# Altium PCB treehopper-fob.PcbDoc
Units mm, origin at the board's own origin, x right, y up, seen from the top; angles counter-clockwise.
Board outline 14.73 x 23.37 mm, 2 copper layers (Top Layer, Bottom Layer), stack 0.871 mm thick; 13 components, 20 nets, 80 pads, 40 vias.
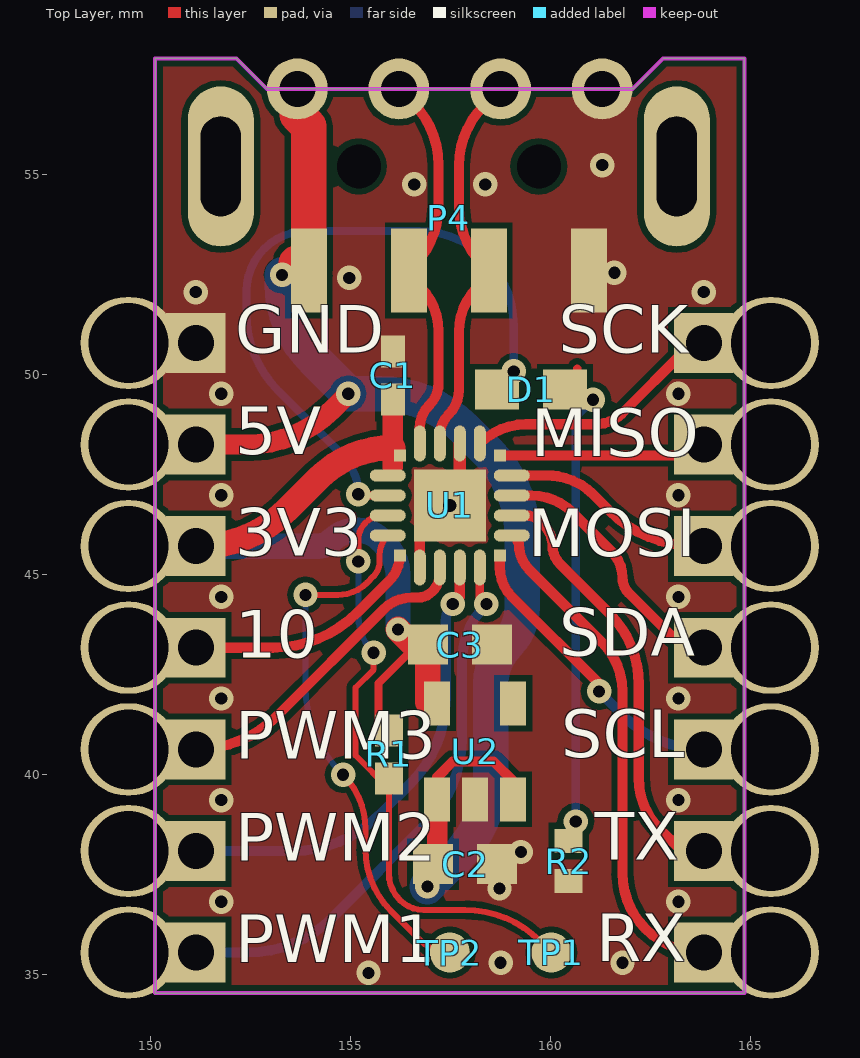
[diagram p0: Top Layer view]
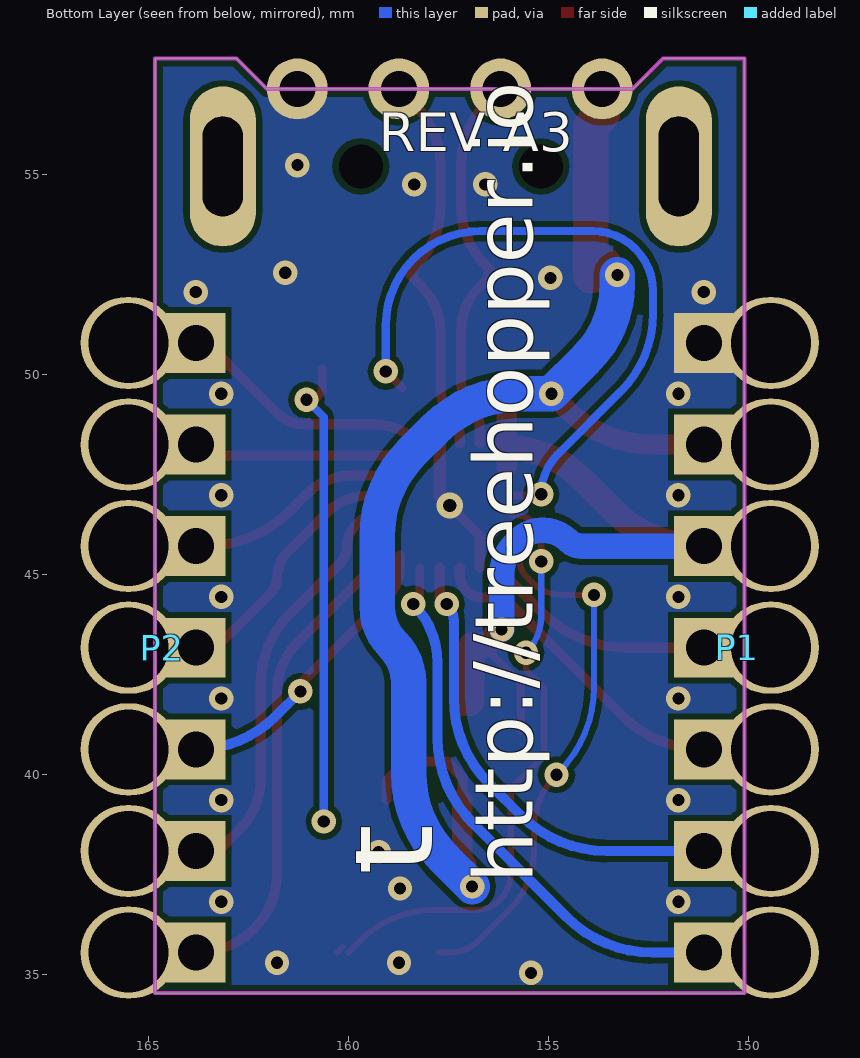
[diagram p1: Bottom Layer view, seen from below]

## Layer stack, top to bottom
Top Solder: solder mask 0.0102, Solder Resist, Dk 3.5
Top Layer: signal copper 0.0356
Dielectric 1: dielectric 0.8, FR-4, Dk 4.8
Bottom Layer: signal copper 0.0356
Bottom Solder: solder mask 0.0102, Solder Resist, Dk 3.5

## Board outline
150.114,34.544 150.114,57.912 152.146,57.912 152.908,57.15 162.052,57.15 162.814,57.912 164.846,57.912 164.846,34.544

## Design rules (kind name [scope] priority, off if disabled: settings)
Clearance [All] p1: gap=0.152
ComponentClearance [All] p1: gap=0 collisioncheckmode=3 verticalgap=0 showdistances=FALSE
DiffPairsRouting [All] p1: maxlimit=0.254 minlimit=0.152 mostfreqgap=0.254 toplayer_minwidth=0.152 toplayer_maxwidth=0.381 toplayer_prefwidth=0.203 bottomlayer_minwidth=0.152 bottomlayer_maxwidth=0.381 bottomlayer_prefwidth=0.203 maxuncoupledlength=12.7
HoleSize [All] p1: absolutevalues=TRUE maxlimit=12.7 minlimit=0.305 maxpercent=80.000 minpercent=20.000
HoleToHoleClearance [All] p1: gap=0 allowstackedmicrovias=TRUE
MinimumSolderMaskSliver [All] p1: minsoldermaskwidth=0
PlaneConnect [All] p1: planeconnectstyle=Direct reliefexpansion=0.508 reliefentries=4 reliefconductorwidth=0.254 reliefairgap=0.254
PolygonConnect [All] p1: connectstyle=Direct reliefconductorwidth=0.254 reliefentries=4 polygonreliefangle="90 Angle" airgapwidth=0.254
RoutingVias [All] p1: holewidth=0.305 width=0.61 viastyle="Through Hole" minholewidth=0.305 minwidth=0.61 maxholewidth=0.711 maxwidth=1.27
SilkToSilkClearance [All] p1: silktosilkclearance=0
SilkToSolderMaskClearance [IsPad] p1: minsilkscreentomaskgap=0 clearancetoexposedcopper=TRUE
SolderMaskExpansion [All] p1: expansion=0
Width [All] p1: maxlimit=12.7 minlimit=0.152 preferedwidth=0.203
22 further rules are at their usual default settings.

## Classes and differential pairs
differential pair USB_D: +USB_D_P -USB_D_N

## Components (designator, comment, footprint, x,y, rotation, side; value= is the part's Value field where it differs from the comment)
C1 "100n" CAPC1005N 156.058,49.987 r270 top
C2 "4u7" CAPC1608N 157.861,37.77 r180 top
C3 "10u" CAPC1608N 157.734,43.256 r180 top
D1 "GREEN" LTST-C190GKT_NO_SILK 159.512,49.632 r0 top
P1 "Header 7" HDR1X7_CASTELATED 151.13,35.56 r90 bottom
P2 "Header 7" HDR1X7_CASTELATED 163.83,50.8 r270 bottom
P4 "USB A Plug" USB/SM2.5-4H4_NOSILK 157.455,57.912 r90 top
R1 "1k" RESC1005N#1 155.956,40.513 r90 top
R2 "1k" RESC1005N#2 160.452,37.846 r90 top
TP1 "TESTPOINT" TESTPOINT100 160.02,35.56 r0 top
TP2 "TESTPOINT" TESTPOINT100 157.48,35.56 r0 top
U1 "EFM8UB10F16G-B-QFN20" QFN50P300X300X90-20N-NO-SILK 157.48,46.736 r270 top
U2 "AP2112K-3.3" SOT23-5AN-no-silk 158.115,40.589 r90 top

## Footprints (in the part's own frame and the unit in brackets; to place one, negate y for a bottom-side part, rotate by r counter-clockwise, add the part's x,y. Pads: shape width x height; smd on the part's side, far side on the other; paste and mask are expansions set on the pad)
CAPC1005N [mm] "Chip Capacitor (0402), Body 1.0x0.5mm, IPC Medium Density"
  rect 0.8x0.6 smd: 1(-0.6,0) 2(0.6,0)
  body extent -0.5,-0.3 0.5,0.3, height 0.2
CAPC1608N [mm] "Chip Capacitor (0603), Body 1.6x0.8mm, IPC Medium Density"
  rect 1x1 smd: 1(-0.8,0) 2(0.8,0)
  body extent -1,-0.39 1,0.39, height 0.79
HDR1X7_CASTELATED [mil] "Connector; Header; 7 Position"
  oval 90.55x95 hole 78.74: 1(0,-66) 2(100,-66) 3(200,-66) 4(300,-66) 5(400,-66) 6(500,-66) 7(600,-66)
  rect 59x59 hole 35.43: 1(0,0) 2(100,0) 3(200,0) 4(300,0) 5(400,0) 6(500,0) 7(600,0)
LTST-C190GKT_NO_SILK [mm] "Blue LED, 0603"
  rect 1.1x1 smd: 1(-0.85,0) 2(0.85,0)
  body extent -0.85,-0.45 0.85,0.45, height 0.9
QFN50P300X300X90-20N-NO-SILK [mm] "QFN, 16+4 Leads, Body 3.00x3.00mm, Pitch 0.50mm, IPC Medium Density"
  rect 0.3x0.3 smd: 1(-1.25,1.25) 6(-1.25,-1.25) 11(1.25,-1.25) 16(1.25,1.25)
  oval 0.9x0.3 smd: 2(-1.55,0.75) 3(-1.55,0.25) 4(-1.55,-0.25) 5(-1.55,-0.75) 12(1.55,-0.75) 13(1.55,-0.25) 14(1.55,0.25) 15(1.55,0.75)
  oval 0.3x0.9 smd: 7(-0.75,-1.55) 8(-0.25,-1.55) 9(0.25,-1.55) 10(0.75,-1.55) 17(0.75,1.55) 18(0.25,1.55) 19(-0.25,1.55) 20(-0.75,1.55)
  rect 1.8x1.8 smd mask+0: 21(0,0)
  body extent -1.5,-1.5 1.5,1.5, height 0.92
RESC1005N#1 [mm] "Chip Resistor, Body 1.1x0.5mm, IPC Medium Density"
  rect 0.8x0.7 smd: 1(-0.6,0) 2(0.6,0)
  body extent -0.5,-0.25 0.5,0.25, height 0.38
RESC1005N#2 [mm] "Chip Resistor, Body 1.1x0.5mm, IPC Medium Density"
  rect 0.6x0.7 smd: 1(-0.5,0) 2(0.5,0)
  body extent -0.5,-0.25 0.5,0.25, height 0.38
SOT23-5AN-no-silk [mm] "SOT23, 5-Leads, Body 2.9x1.6mm, Pitch 0.95mm, Lead Span 2.8mm, IPC Medium Density"
  rect 1.1x0.65 smd: 1(-1.2,0.95) 2(-1.2,0) 3(-1.2,-0.95) 4(1.2,-0.95) 5(1.2,0.95)
  body extent -1.5,-1.5 1.5,1.5, height 1.3
TESTPOINT100 [mm] "Testpoint, 1mm"
  round 1 smd paste-1: 1(0,0)
USB/SM2.5-4H4_NOSILK [mm] "Connector; USB1.1, Type A, SM; 4 Position; Right Angle"
  rect 2.1x0.9 smd: 1(-5.3,3.5) 2(-5.3,1) 3(-5.3,-1) 4(-5.3,-3.5)
  oval 4x1.65 hole 1 slot 2.5 at 0 deg: 5(-2.7,-5.7) 6(-2.7,5.7)
  round 0.8 hole 1.1 unplated: MH1(-2.7,-2.25) MH2(-2.7,2.25)
  body extent -6.22,-6.37 15.06,6.32, height 3.05

## Part data
C1: library part "Cap Semi", "Capacitor (Semiconductor SIM Model)"
C2 C3: library part "Cap Semi", "CAP SEMI 4U7 10V 0603"
D1: library part LED_GREEN, "Typical greenGaAs LED"
P1 P2: "Header, 7-Pin"
R1 R2: library part "Res Semi", "Semiconductor Resistor"
TP1 TP2: "Testpoint"
U1: "IC MCU 16KB 20QFN"
U2: "AP2112 IC REG LDO 3.3V 0.6A SOT25"

## Free pads (board coordinates)
  round 1.524 hole 0.9 paste+0: 16(153.67,57.15) 17(156.21,57.15) 18(158.75,57.15) 19(161.29,57.15)

## Via types
v1: diameter 0.61, hole 0.305, Top Layer to Bottom Layer, tented both sides, 39 vias
v2: diameter 0.66, hole 0.33, Top Layer to Bottom Layer, tented both sides, 1 vias

## Nets (pads, with @x,y where several pads share a name; then routed paths per layer and width w, separated by ;. In a path a pad name is that pad's centre, name@x,y a point inside that pad or via, vN(x,y) a via of type N, cw(c..) or ccw(c..) an arc to the next point about the centre after c; other vN are vias at no path point)
3V3: C1.2 C3.2 P1.5 R1.2 U1.6 U1.7 U2.5 | length 19.8
  Top Layer w0.203: R1.2@155.702,41.113 155.702,42.291 156.667,43.256 C3.2
  Top Layer w0.508: 156.058,47.701 156.058,48.184 C1.2
  Top Layer w0.635: P1.5@151.13,45.72 151.25,45.72 ccw(c151.25,48.743) 153.387,46.605 154.193,47.411 cw(c156.058,45.547) 156.058,48.184 ; v1(156.185,43.637) 156.566,43.256 C3.2@156.667,43.256 ; C3.2 U2.5@156.934,42.02 ; U2.5@156.957,41.789 156.934,41.812 U2.5@156.934,42.02 ; U2.5 U2.5@156.934,42.02
  Bottom Layer w0.635: P1.5@151.13,45.72 154.181,45.72 ccw(c154.181,46.208) 154.526,45.863 cw(c155.131,45.257) 154.803,46.048 cw(c155.131,45.257) 155.131,46.114 155.194,46.114 cw(c155.194,45.339) 155.741,45.887 ; 155.742,45.887 155.869,45.759 cw(c155.106,44.997) 156.185,44.997 v1(156.185,43.637)
5V: C2.2 P1.6 P4.1 pad.16 U2.1 U2.3 | length 32.9
  Top Layer w0.254: U2.1 157.165,39.944 157.556,40.335 158.572,40.335 159.065,39.842 U2.3
  Top Layer w0.508: P1.6@151.13,48.26 152.418,48.26 ccw(c152.418,51.283) 154.554,49.144 ; 154.555,49.145 v1(154.94,49.53) ; C2.2 157.165,37.874 U2.1
  Top Layer w0.889: P4.1@153.645,52.795 P4.1@153.955,52.485 ; pad.16@153.67,56.503 153.955,56.219 P4.1
  Bottom Layer w0.889: v1(153.289,52.502) 153.289,52.277 ccw(c155.934,52.277) 154.063,50.407 v1(154.94,49.53) 155.72,49.53 cw(c155.72,46.507) 157.856,48.646 ; v1(156.921,37.211) 157.623,37.913 ; 157.624,37.914 ccw(c155.486,40.051) 158.509,40.051 158.509,42.306 cw(c159.853,42.306) 158.902,43.256 ccw(c157.952,44.207) 159.296,44.207 159.296,45.954 ccw(c156.273,45.954) 158.412,48.09 ; 157.857,48.645 158.411,48.091
C2CK: R1.1 TP1.1 U1.9 | length 15.2
  Top Layer w0.152: v1(155.194,45.339) 155.194,45.872 cw(c155.808,45.872) 155.373,46.306 ; 155.374,46.306 cw(c155.808,45.872) 155.808,46.486 U1.9 ; v1(155.575,43.053) 155.575,42.631 155.123,42.179 155.123,40.492 155.956,39.659 155.956,37.541 ccw(c156.905,37.541) 156.233,36.871 156.235,36.869 ; 156.236,36.868 ccw(c156.82,37.453) 156.82,36.627 157.855,36.627 cw(c157.855,33.976) 159.73,35.85 TP1.1 ; TP1.1@160.16,35.7 TP1.1@160.299,35.56
  Bottom Layer w0.152: v1(155.194,45.339) 155.194,43.973 ccw(c156.495,43.973) v1(155.575,43.053)
C2D: TP2.1 U1.10 | length 13.6
  Top Layer w0.152: v1(153.873,44.501) 154.679,44.501 ccw(c154.679,45.541) 154.908,44.526 ccw(c154.679,45.541) 155.415,44.806 155.571,44.962 ccw(c155.194,45.339) 155.727,45.339 155.727,45.497 cw(c156.419,45.497) U1.10 ; v1(154.813,40.005) cw(c153.464,38.656) 155.336,39.025 cw(c153.464,38.656) 155.372,38.656 155.372,38.151 ccw(c157.579,38.151) 156.018,36.59 156.743,35.865 ccw(c157.48,36.602) TP2.1 TP2.1@157.759,35.56
  Bottom Layer w0.152: v1(153.873,44.501) 153.873,42.197 ccw(c156.896,42.197) v1@154.758,40.06 ; v1@154.758,40.06 v1(154.813,40.005)
GND: C1.1 C2.1 C3.1 P1.7 P4.4 pad.19 R2.1 U1.3 U1.12 U1.21 U2.2 | length 3.5
  Top Layer w0.254: U1.12 156.73,45.986 v2(157.48,46.736)
  Top Layer w0.305: v2(157.48,46.736) 157.73,46.986 U1.3
  other v1: 155.448,35.052 158.75,35.306 161.798,35.306 151.765,36.83 163.195,36.83 158.725,37.16 159.258,38.075 151.765,39.37 163.195,39.37 151.765,41.91 163.195,41.91 151.765,44.45 163.195,44.45 151.765,46.99 163.195,46.99 151.765,49.53 163.195,49.53 151.13,52.07 163.83,52.07 154.965,52.426 161.595,52.553 156.591,54.762 158.369,54.762 161.29,55.245
LED: D1.1 U1.8 | length 17.6
  Top Layer w0.203: v1(155.194,47.015) 155.194,46.965 155.245,46.914 155.317,46.986 U1.8 ; D1.1@158.662,49.671 v1(159.08,50.089)
  Bottom Layer w0.203: 153.199,49.594 cw(c155.132,51.525) 152.4,51.525 152.4,52.095 cw(c153.899,52.095) 153.899,53.594 156.718,53.594 cw(c156.718,51.232) 159.08,51.232 v1(159.08,50.089) ; 153.2,49.593 154.781,48.013 cw(c153.784,47.015) v1(155.194,47.015) v1@155.245,47.066
MISO: P2.2 U1.1 | length 5.2
  Top Layer w0.254: U1.1 163.169,47.986 ccw(c163.169,48.921) P2.2@163.83,48.26
MOSI: P2.3 U1.20 | length 5.3
  Top Layer w0.254: U1.20 159.925,47.486 cw(c159.925,45.879) 160.179,47.466 cw(c159.925,45.879) 161.061,47.015 161.472,46.605 ccw(c163.609,48.743) 163.609,45.72 P2.3@163.83,45.72
NetD1_2: D1.2 R2.2 | length 11.8
  Top Layer w0.203: 160.667,50.165 160.667,49.569 160.858,49.378 v1(161.061,49.378)
  Bottom Layer w0.203: v1(160.63,38.837) 160.63,48.946 v1(161.061,49.378)
P1.2: P1.4 U1.11 | length 6.1
  Top Layer w0.254: P1.4@151.13,43.18 153.04,43.18 ccw(c153.04,46.203) 155.178,44.065 155.97,44.857 ccw(c155.341,45.486) 156.083,44.996 ccw(c155.341,45.486) U1.11
PWM1: P1.1 U1.15 | length 13.8
  Top Layer w0.203: U1.15 158.23,44.437 v1(158.394,44.272)
  Bottom Layer w0.254: P1.1@151.13,35.56 152.418,35.56 ccw(c152.418,38.583) 154.554,36.444 ; 154.555,36.445 156.9,38.79 ; 156.9,38.79 ccw(c154.762,40.927) 157.785,40.927 157.785,42.8 cw(c159.866,42.8) v1(158.394,44.272)
PWM2: P1.2 U1.14 | length 11.7
  Top Layer w0.254: v1(157.556,44.272) 157.73,44.446 U1.14
  Bottom Layer w0.254: P1.2@151.13,38.1 153.561,38.1 ccw(c153.561,41.123) 155.697,38.984 ; 155.698,38.985 156.493,39.78 ; 156.494,39.781 ccw(c154.356,41.917) 157.378,41.917 157.378,43.843 cw(c157.985,43.843) 157.402,44.01 cw(c157.985,43.843) v1(157.556,44.272)
PWM3: P1.3 U1.13 | length 8.2
  Top Layer w0.254: P1.3@151.339,40.64 151.13,40.64 ccw(c151.13,43.53) 153.173,41.486 155.83,44.143 ; 155.831,44.144 cw(c156.54,43.433) 156.54,44.437 156.688,44.437 ccw(c156.688,44.937) 157.042,44.584 ccw(c156.586,45.039) 157.23,45.039 U1.13
RX: P2.7 U1.17 | length 12.4
  Top Layer w0.254: 159.18,45.836 cw(c159.115,45.771) 159.207,45.771 ccw(c160.127,45.771) 159.477,45.12 161.29,43.307 cw(c160.064,42.081) 161.798,42.081 161.798,37.537 ccw(c163.749,37.537) 162.369,36.157 ccw(c163.811,37.598) 163.811,35.56 P2.7@163.83,35.56
SCK: P2.1 U1.2 | length 6.5
  Top Layer w0.254: U1.2@158.231,48.287 cw(c159.394,47.122) 159.394,48.768 161.123,48.768 ccw(c161.123,49.722) 161.34,48.793 ccw(c161.123,49.722) 161.798,49.047 163.353,50.602 cw(c163.83,50.125) P2.1@163.83,50.8
SCL: P2.5 U1.16 | length 7.5
  Top Layer w0.254: U1.16 158.73,45.196 ccw(c159.775,45.196) 159.036,44.457 161.214,42.279 v1(161.214,42.088)
  Bottom Layer w0.254: v1(161.214,42.088) 161.835,41.466 ccw(c163.83,43.461) P2.5@163.83,40.64
SDA: P2.4 U1.19 | length 6.6
  Top Layer w0.254: U1.19 159.521,46.986 cw(c159.521,45.525) 160.553,46.558 161.529,45.583 cw(c160.878,44.933) 161.798,44.933 ccw(c162.355,44.933) 161.961,44.539 162.322,44.178 162.959,43.541 ccw(c163.83,44.412) P2.4@163.83,43.18
TX: P2.6 U1.18 | length 11.8
  Top Layer w0.254: U1.18 159.393,46.486 cw(c159.393,46.025) 159.719,46.351 159.848,46.222 cw(c159.371,45.745) 159.854,46.216 ; 159.854,46.216 cw(c159.371,45.745) 160.045,45.745 ccw(c160.72,45.745) 160.243,45.268 161.468,44.043 cw(c159.69,42.266) 162.204,42.266 162.204,39.921 ccw(c164.026,39.921) 162.738,38.633 162.876,38.495 ; 162.876,38.495 ccw(c163.83,39.449) 163.83,38.1 163.271,38.1 162.876,38.495
USB_D_N: P4.2 pad.17 U1.5 | length 9.7
  Top Layer w0.254: pad.17 156.554,56.806 cw(c154.993,55.245) 157.201,55.245 157.201,54.229 cw(c155.098,54.229) 156.883,53.118 cw(c155.098,54.229) 156.585,52.742 P4.2 ; P4.2@156.518,52.549 156.455,52.485 P4.2@156.743,52.196 ; U1.5 156.73,48.666 cw(c157.556,48.666) 156.972,49.25 ccw(c156.42,49.802) 157.201,49.802 157.201,51.092 ccw(c155.64,51.092) P4.2@156.744,52.195
USB_D_P: P4.3 pad.18 U1.4 | length 9.8
  Top Layer w0.254: U1.4 157.23,48.473 cw(c157.997,48.473) 157.234,48.551 cw(c157.997,48.473) 157.455,49.015 ; 157.455,49.015 ccw(c156.841,49.628) 157.709,49.628 157.709,51.074 cw(c159.314,51.074) 158.179,52.209 158.455,52.485 P4.3@158.391,52.549 ; P4.3 158.307,52.76 cw(c159.75,54.204) 157.709,54.204 157.709,55.232 cw(c159.824,55.232) 158.328,56.728 pad.18
pads on no net: P4.5 P4.6 P4.MH1 P4.MH2 U2.4

## Polygon pours and split planes (outlines as drawn)
GND on Top Layer "BottomGnd" (solid, remove dead copper, pour order 8): 149.86,57.81 152.248,57.81 152.908,57.15 162.052,57.15 162.814,57.81 165.1,57.81 165.1,34.29 149.86,34.29
GND on Bottom Layer "BottomGnd" (solid, remove dead copper, pour order 9): 149.86,57.81 165.1,57.81 165.1,34.29 149.86,34.29

## Keep-outs
Keep-Out Layer:
  the board outline again, w0.1

## Silkscreen, mask and mechanical layers (free items; w line width, h text height)
Top Overlay:
  text "GND" at 152.121,50.165 h2.03
  text "SCK" at 160.205,50.165 h2.03
  text "5V" at 152.12,47.628 h2.03
  text "MISO" at 159.512,47.574 h2.03
  text "3V3" at 152.12,45.09 h2.03
  text "MOSI" at 159.436,45.085 h2.03
  text "SDA" at 160.214,42.59 h2.03
  text "10" at 152.121,42.537 h2.03
  text "SCL" at 160.265,40.049 h2.03
  text "PWM3" at 152.121,40.015 h2.03
  text "TX" at 161.105,37.492 h2.03
  text "PWM2" at 152.121,37.462 h2.03
  text "RX" at 161.139,34.95 h2.03
  text "PWM1" at 152.121,34.925 h2.03
Bottom Overlay:
  text "REV A3" at 159.258,55.27 h1.65
  text "t" at 157.15,37.49 h4.06 r270
  text "http://treehopper.io" at 154.915,37.287 h2.54 r270

## Text inside footprints (layer, text, board x,y; h text height)
P4: Mechanical 1 "PCB Edge" at 162.627,58.385 h0.25 r180